# Altium PCB PCB1.PcbDoc
Units mil, origin at the board's own origin, x right, y up, seen from the top; angles counter-clockwise.
Board outline 1500 x 625 mil, 2 copper layers (Top Layer, Bottom Layer), stack 61.8 mil thick; 12 components, 7 nets, 58 pads, 21 vias.
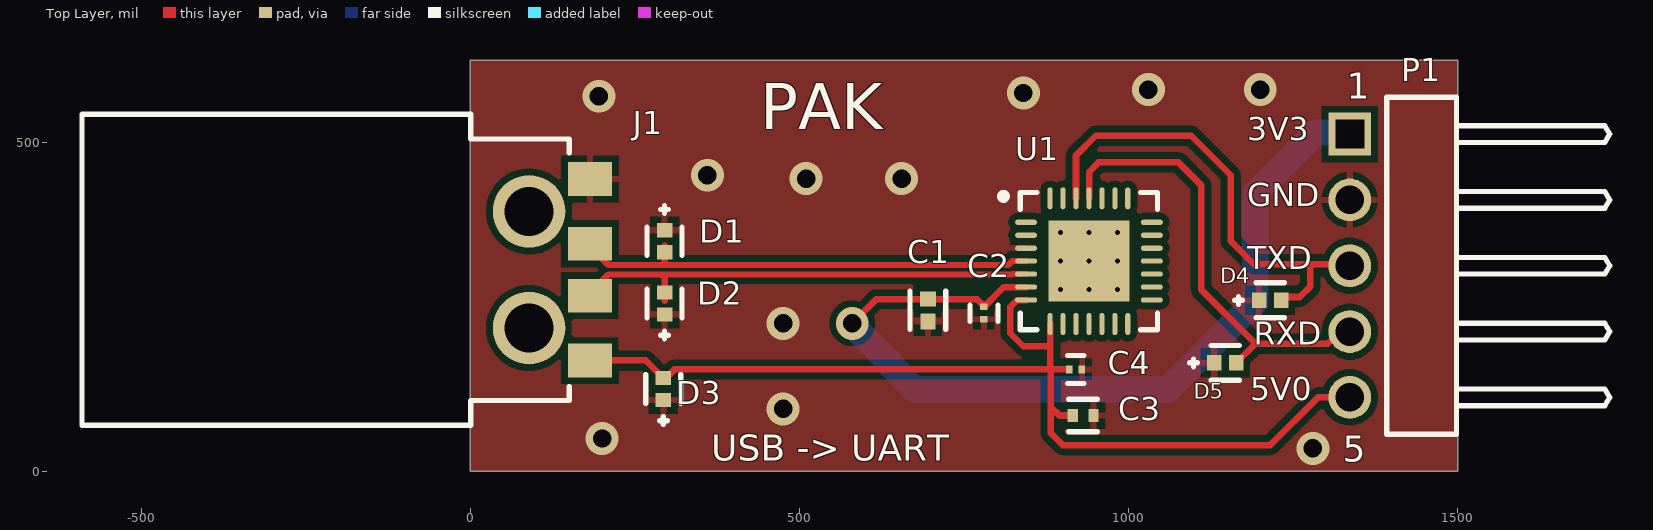
[diagram p0: Top Layer view]
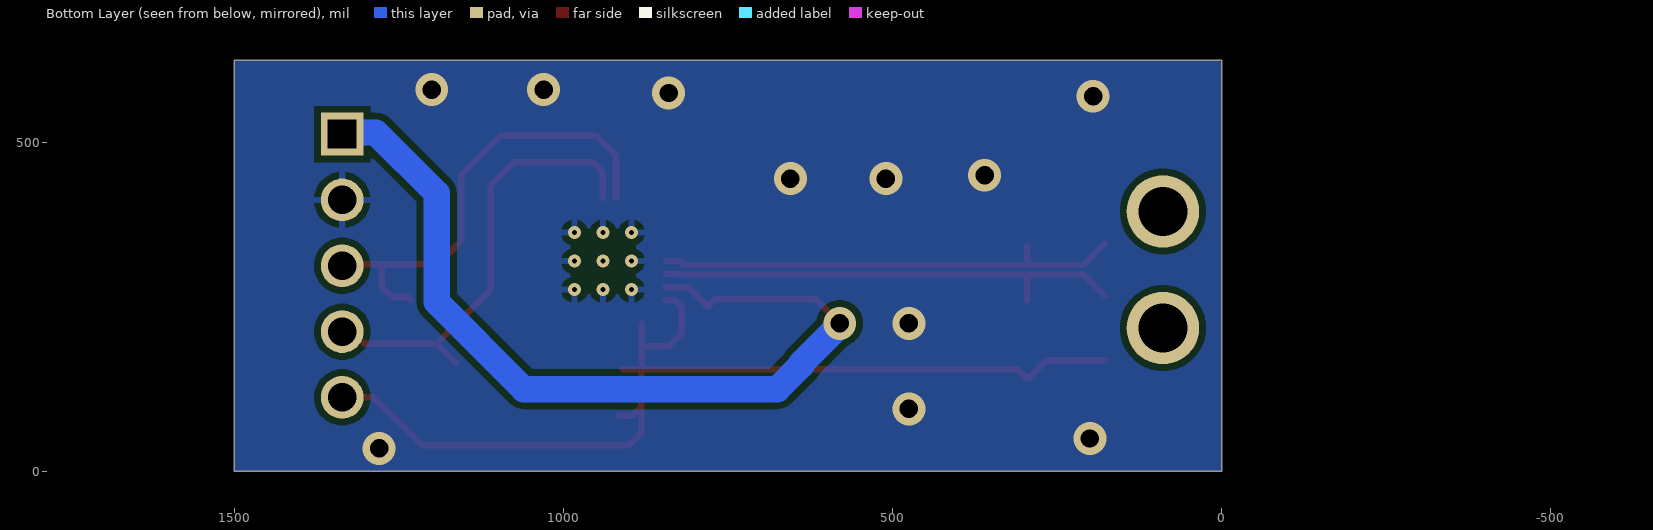
[diagram p1: Bottom Layer view, seen from below]
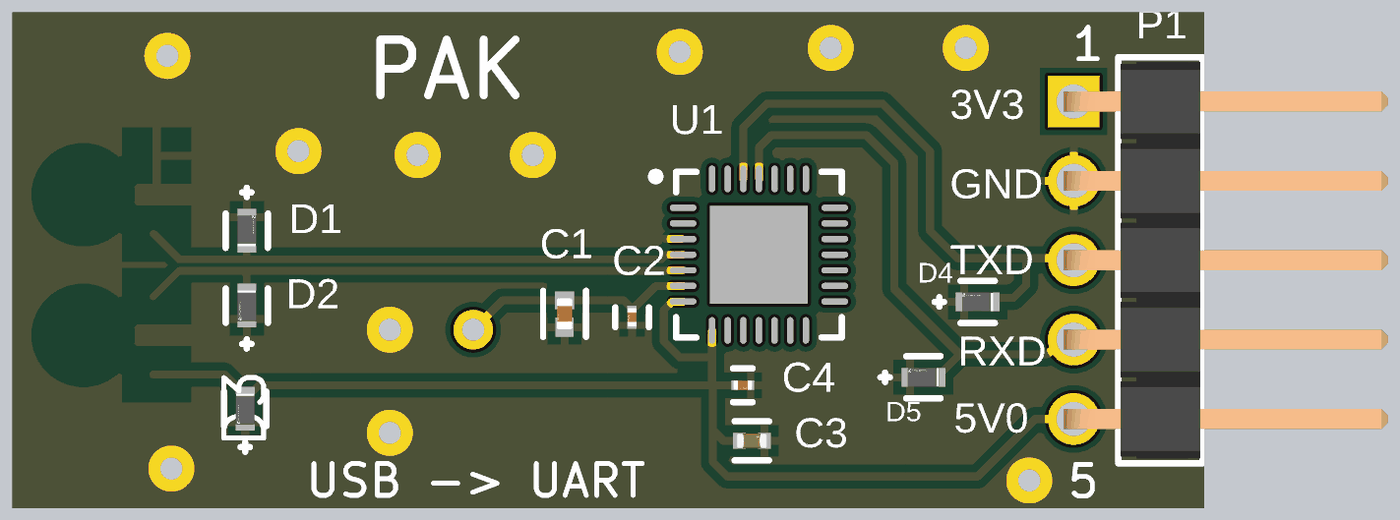
[diagram p2: 3D render of the assembled board from above, using the file's embedded part models]

## Layer stack, top to bottom
Top Solder: solder mask 0.4, Solder Resist, Dk 3.5
Top Layer: signal copper 1.4
Dielectric 1: dielectric 59, FR-4, Dk 4.8
Bottom Layer: signal copper 1.4
Bottom Solder: solder mask 0.4, Solder Resist, Dk 3.5

## Board outline
0,0 0,625 1500,625 1500,0

## Design rules (kind name [scope] priority, off if disabled: settings)
Clearance [All] p1: gap=10 ignorepadtopadclearanceinfootprint=FALSE except(0: Arc-Hole Track-Hole SMDPad-Hole THPad-Hole Via-Hole Fill-Hole Poly-Hole Region-Hole Text-Hole)
DiffPairsRouting [InDifferentialPair('DATA')] p1: maxlimit=5 minlimit=5 mostfreqgap=5 toplayer_minwidth=9.44 toplayer_maxwidth=9.44 toplayer_prefwidth=9.44 bottomlayer_minwidth=9.44 bottomlayer_maxwidth=9.44 bottomlayer_prefwidth=9.44 impedanceprofiledriven=TRUE impedanceprofileid={4EF35F85-3302-4D97-B5A8-BC5B2EF41BB8} impedanceprofilevalue=90.000000 maxuncoupledlength=500
PolygonConnect [All] p1: connectstyle=Relief reliefconductorwidth=10 reliefentries=4 polygonreliefangle="90 Angle" airgapwidth=10
RoutingVias [All] p1: holewidth=28 width=50 viastyle="Through Hole" minholewidth=28 minwidth=50 maxholewidth=28 maxwidth=50
SolderMaskExpansion [All] p1: expansion=4 istentingtop=FALSE
Width [All] p1: maxlimit=10 minlimit=10 preferedwidth=10
29 further rules are at their usual default settings.

## Classes and differential pairs
differential pair DATA: +NetD1_2 -NetD2_2

## Components (designator, comment, footprint, x,y, rotation, side; value= is the part's Value field where it differs from the comment)
C1 "4.7uF" FP-GRM155-0_1-IPC_B 695,245 r270 top
C2 "100nF" FP-GRM033-0_03-MFG 780,240.65 r270 top
C3 "1uF" FP-GRM15-0_1-MFG 930.75,85 r0 top
C4 "100nF" FP-GRM033-0_03-MFG 919.35,155 r0 top
D1 "UCLAMP3601P.TNT" FP-SLP1006P2-MFG 295,349.74 r270 top
D2 "UCLAMP3601P.TNT" FP-SLP1006P2-MFG 295,255.26 r90 top
D3 "UCLAMP3601P.TNT" FP-SLP1006P2-MFG 292.98,125.29 r90 top
D4 "UCLAMP3601P.TNT" FP-SLP1006P2-MFG 1215,260 r0 top
D5 "UCLAMP3601P.TNT" FP-SLP1006P2-MFG 1146.73,165 r0 top
J1 "629004113921" 629004113921 -220.06,306.42 r270 top
P1 "61300511021" 61300511021 1445,312.5 r90 top
U1 "CP2102-GM" SLAB-QFN-28-3125x3125TP_N 939.68,319.53 r0 top

## Footprints (in the part's own frame and the unit in brackets; to place one, negate y for a bottom-side part, rotate by r counter-clockwise, add the part's x,y. Pads: shape width x height; smd on the part's side, far side on the other; paste and mask are expansions set on the pad)
61300511021 [mm] "Pin Header, pitch 2.54 mm, THT, Angled, single row, 5p"
  rect 1.65x1.65 hole 1.1 square: 1(5.08,2.77)
  round 1.65 hole 1.1: 2(2.54,2.77) 3(0,2.77) 4(-2.54,2.77) 5(-5.08,2.77)
  silkscreen extent -6.5,-7.27 6.5,1.35, body extent -6.35,-7.27 6.35,3.09, height 2.58
629004113921 [mm] "USB 2.0 Plug Type A SMT with Clip"
  rect 1.3x1.7 smd: 1(3.5,10.2) 2(1,10.2) 3(-1,10.2) 4(-3.5,10.2)
  round 2.8 hole 1.9: Shell(-2.25,7.85) Shell(2.25,7.85)
  silkscreen extent -6,-9.4 6,9.4, body extent -6,-9.4 6,10.4, height 2.25
FP-GRM15-0_1-MFG [mm]
  rect 0.4x0.5 smd paste+0 mask+0: 1(-0.4,0) 2(0.4,0)
  silkscreen extent -0.55,-0.63 0.55,0.63, body extent -0.7,-0.38 0.7,0.38, height 0.25
FP-GRM033-0_03-MFG [mm]
  rect 0.25x0.3 smd paste+0 mask+0: 1(-0.238,0) 2(0.238,0)
  silkscreen extent -0.32,-0.54 0.32,0.54, body extent -0.46,-0.27 0.46,0.27, height 0.25
FP-GRM155-0_1-IPC_B [mil]
  rect 22.54x24.23 smd paste+0 mask+0: 1(-16.87,0)
  rect 24.23x22.54 smd paste+0 mask+0: 2(16.87,0)
  silkscreen extent -29,-27 29,27, body extent -35,-17 35,17, height 10
FP-SLP1006P2-MFG [mm]
  rect 0.55x0.6 smd paste+0 mask+0: 1(-0.425,0) 2(0.425,0)
  silkscreen extent -1.38,-0.67 0.55,0.67, body extent -0.8,-0.45 0.8,0.45, height 0.25
SLAB-QFN-28-3125x3125TP_N [mm] "QFN, 28-Leads, Body 5x5mm, Pitch 0.5mm, Thermal Pad 3.13x3.13mm, IPC Medium Density"
  oval 0.85x0.2 smd: 1(-2.425,1.5) 2(-2.425,1) 3(-2.425,0.5) 4(-2.425,0) 5(-2.425,-0.5) 6(-2.425,-1) 7(-2.425,-1.5) 15(2.425,-1.5) 16(2.425,-1) 17(2.425,-0.5) 18(2.425,0) 19(2.425,0.5) 20(2.425,1) 21(2.425,1.5)
  oval 0.2x0.85 smd: 8(-1.5,-2.425) 9(-1,-2.425) 10(-0.5,-2.425) 11(0,-2.425) 12(0.5,-2.425) 13(1,-2.425) 14(1.5,-2.425) 22(1.5,2.425) 23(1,2.425) 24(0.5,2.425) 25(0,2.425) 26(-0.5,2.425) 27(-1,2.425) 28(-1.5,2.425)
  rect 3.13x3.13 smd: 29(0,0)
  silkscreen extent -3.42,-2.65 2.65,2.65, body extent -2.5,-2.5 2.5,2.5, height 1

## Part data
C1: library part CMP-2008-04549-2, "Chip Multilayer Ceramic Capacitors for General Purpose, 0402, 4.7uF, X5R, 15%, 20%, 6.3V", Case Code (Imperial)=0402, Case Code (Metric)=1005, Dielectric=X5R, Max Operating Temperature=85°C, Min Operating Temperature=-55°C, Package Quantity=10000, Tolerance=20%, Voltage=6.3V, Capacitance=4.7uF, Case/Package=0402, Contact Plating=Tin, Depth=0.5mm, Height=0.5mm, Lead Free="Lead Free", Length=1mm, Mount="Surface Mount", Packaging="Tape and Reel", REACH SVHC="No SVHC", Termination=SMD/SMT, Thickness=0.022inch, Voltage Rating=6.3V, Voltage Rating (DC)=6.3V, Weight=0.000212oz, Width=0.02inch
C2 C4: library part CMP-06035-000062-2, "Chip Multilayer Ceramic Capacitors for General Purpose, 0201, 0.10uF, X5R, 15%, 10%, 6.3V", Case Code (Imperial)=0201, Case Code (Metric)=0603, Dielectric=X5R, Max Operating Temperature=85°C, Min Operating Temperature=-55°C, Package Quantity=1, Tolerance=10%, Voltage=6.3V, Capacitance=100nF, Case/Package=0201, Depth=0.3mm, Height=0.3mm, Lead Free="Lead Free", Length=0.6mm, Material=Ceramic, Mount="Surface Mount", Packaging="Tape and Reel", Radiation Hardening=No, REACH SVHC="No SVHC", Termination=SMD/SMT, Thickness=0.013inch, Voltage Rating=6.3V, Voltage Rating (DC)=6.3V, Weight=6E-06oz, Width=0.012inch
C3: library part CMP-2008-04556-2, "CAP CER 1UF 10V X5R 0402", Manufacturer=Murata, Manufacturer Part Number=GRM155R61A105KE15D, Package=GRM15-0.1, Temperature="-55°C to +85°C", Temperature Characteristic=X5R, Temperature Coefficient=15%, Temperature Range High=+85°C, Temperature Range Low=-55°C, Tolerance=10%, Voltage Rating=10V, Automotive=No, Capacitance=1uF, Category=Cap, ComponentLink2Description=Datasheet, ComponentLink2URL=https://search.murata.co.jp/Ceramy/image/img/A01X/G101/ENG/GRM155R61A105KE15-01A.pdf, Device Class L1="Passive Components", Device Class L2=Capacitors, Device Class L3="Ceramic Capacitors", Digikey Description="CAP CER 1UF 10V X5R 0402", Height=0.55mm, Ipc Land Pattern Name=CAPC10050X50, Lead Free=Yes, Material=Ceramic, Mouser Description="0402 1 uF 10 V ±10% Tolerance X5R Surface Mount Multilayer Ceramic Capacitor", Octopart=https://octopart.com/grm155r61a105ke15d-murata-197442, RoHS=TRUE
D1 D2 D3 D4 D5: library part CMP-56445-000005-1, "TVS DIODE 33VWM 60VC SLP1006P2", Case Code (Imperial)=0402, Case Code (Metric)=1006, Case/Package=SMD/SMT, Clamping Voltage=60V, Leakage Current=1uA, Max Breakdown Voltage=45V, Max Operating Temperature=125°C, Min Breakdown Voltage=36V, Min Operating Temperature=-40°C, Peak Pulse Current=2A, Peak Pulse Power=125W, Power Dissipation=170W, Power Line Protection=No, Resistor Type=Zener, Reverse Standoff Voltage=33V, Clamping Voltage-Max=60V, Depth=0.6mm, Diode Type=ZENER, Direction=Unidirectional, Element Configuration=Single, Lead Free="Lead Free", Length=1mm, Mount="Surface Mount", Number of Pins=2, Number of Unidirectional Channels=1, Packaging="Tape and Reel", Radiation Hardening=No, RoHS Compliant=Yes, Series="Automotive, AEC-Q100, uClamp®", Working Voltage=33V
J1: library part CMP-1502-03242-2, Contact Resistance=20mΩ, Current Rating=1.5A, Insulation Resistance=1GΩ, Max Operating Temperature=105°C, Min Operating Temperature=-40°C, Operating Supply Voltage=30V, Connector Type=USB, Contact Plating=Gold, Features=Shielded, Gender=Male, Lead Free="Lead Free", Length=18.8mm, Mount="Horizontal, Surface Mount", NexarPartId=19991169, Number of Contacts=4, Number of Pins=4, Orientation=Horizontal, REACH SVHC=Unknown, RoHS=Compliant, Termination=SMD/SMT, USB Standard="USB 2.0"
P1: library part CMP-1502-01067-2, Color=Black, Contact Resistance=20mΩ, Current Rating=3A, Operating Supply Voltage=250V, Connector Type="Male Pin", Contact Material=Copper, Contact Mating Length=5.9944mm, Contact Plating=Gold, Gender=Male, Lead Pitch=2.54mm, Mount="Through Hole", NexarPartId=32855525, Number of Contacts=5, Number of Pins=5, Number of Positions=5, Number of Rows=1, Packaging=Bulk, Pitch=2.54mm, REACH SVHC=Unknown, RoHS=Compliant, Termination=Solder
U1: library part CMP-0511-00012-1, "Single-Chip USB to UART Bridge, 1024 Bytes EEPROM, -40 to 85 degC, 28-pin QFN, Tube", Manufacturer="Silicon Labs", Code_IPC=J-STD-020C, Code_JEDEC=MO-220, ComponentLink1Description="Manufacturer URL", ComponentLink1URL=http://www.silabs.com/, ComponentLink2Description=Datasheet, ComponentLink2URL=http://www.silabs.com/Support%20Documents/TechnicalDocs/CP2102-9.pdf, ComponentLink3Description="Package Specification", ComponentLink3URL=http://www.silabs.com/Support%20Documents/TechnicalDocs/C8051T61x.pdf, DatasheetVersion="Rev. 1.5", EEPROM="1024 Bytes", Internal Oscillator=TRUE, Mounting Technology="Surface Mount", PackageDescription="28-Pin Quad-Flat No-Leads Package, Body 5 x 5 mm, Pitch 0.5 mm", PackageReference=QFN-28, PartNumber=CP2102-GM, Sub-Family="USB Bridges"

## Via types
v1: diameter 50, hole 28, Top Layer to Bottom Layer, 12 vias
v2: diameter 19.68, hole 7.87, Top Layer to Bottom Layer, 9 vias

## Nets (pads, with @x,y where several pads share a name; then routed paths per layer and width w, separated by ;. In a path a pad name is that pad's centre, name@x,y a point inside that pad or via, vN(x,y) a via of type N, cw(c..) or ccw(c..) an arc to the next point about the centre after c; other vN are vias at no path point)
GND: C1.2 C2.2 C3.2 C4.2 D1.1 D2.1 D3.1 D4.1 D5.1 J1.4 P1.2 U1.3 U1.29
  other v1: 1280,35 200,50 475,95 475,225 510,445 655,445 360,450 195,570 840,575 1030,580 1200,580
  other v2: 896.38,276.22 939.68,276.22 982.99,276.22 896.38,319.53 939.68,319.53 982.99,319.53 896.38,362.83 939.68,362.83 982.99,362.83
NetD1_2: D1.2 J1.3 U1.4 | length 713.7
  Top Layer w9.44: J1.3@177.52,345.79 209.67,313.64 291.17,313.64 ; D1.2@295,343.27 D1.2 295,317.46 291.17,313.64 ; U1.4 822.76,319.53 816.87,313.64 291.17,313.64
NetD2_2: D2.2 J1.2 U1.5 | length 722.3
  Top Layer w9.44: J1.2@177.52,267.05 209.67,299.2 290,299.2 ; 295,259.23 D2.2 295,294.2 290,299.2 ; U1.5 823.49,299.84 822.85,299.2 290,299.2
NetD4_2: D4.2 P1.3 U1.26 | length 720.8
  Top Layer w10: U1.26 920,480 950,510 1095,510 1155,450 1155,350 1190,315 1276.15,315 ; D4.2 1236.73,265 1260,265 1276.15,281.15 1276.15,315 ; P1.3 1333.44,315 1276.15,315
NetD5_2: D5.2 P1.4 U1.25 | length 698
  Top Layer w10: U1.25@940,415 940,455 955,470 1075,470 1110,435 1110,276.54 1192.5,194.04 ; D5.2 1192.5,194.04 ; P1.4 1321.07,212.5 1302.61,194.04 1192.5,194.04
VBUS: C3.1 C4.1 D3.2 J1.1 P1.5 U1.7 U1.8 | length 1583
  Top Layer w10: J1.1@177.52,168.62 266.38,168.62 D3.2 297.02,142.02 310,155 881.75,155 ; U1.7@844.21,260.16 830.16,260.16 820,250 820,210 839.91,190.09 880.63,190.09 ; U1.8 880.63,190.09 ; C4.1 881.75,155 ; C3.1 895,85 881.75,98.25 ; P1.5 1287.5,112.5 1215,40 900,40 881.75,58.25 881.75,98.25 ; 880.63,190.09 880.63,156.12 881.75,155 ; 881.75,98.25 881.75,155
VDD: C1.1 C2.1 P1.1 U1.6 | length 1360.7
  Top Layer w10: v1(580,225) 616.87,261.87 769.35,261.87 780,251.22 C2.1 810.16,280.16 U1.6
  Bottom Layer w10: P1.1@1333.44,515 P1.1
  Bottom Layer w25: P1.1@1333.44,510 P1.1
  Bottom Layer w40: v1(580,225) 580,222.29 638.48,163.81 638.48,161.52 675,125 1060,125 1192.5,257.5 1192.5,422.5 1285,515 P1.1@1333.44,515
pads on no net: J1.Shell U1.1 U1.2 U1.9 U1.10 U1.11 U1.12 U1.13 U1.14 U1.15 U1.16 U1.17 U1.18 U1.19 U1.20 U1.21 U1.22 U1.23 U1.24 U1.27 U1.28

## Polygon pours and split planes (outlines as drawn)
GND on Top Layer "GND Pour" (solid, pour order 0): 0,625 1500,625 1500,0 0,0
GND on Bottom Layer "GND Pour" (solid, pour order 1): 0,625 1500,625 1500,0 0,0

## Silkscreen, mask and mechanical layers (free items; w line width, h text height)
Top Overlay:
  text "1" at 1331,566 h40
  text "PAK" at 440,520 h70
  text "3V3" at 1180,490.69 h60
  text "GND" at 1180,390.64 h60
  text "TXD" at 1180,295 h60
  text "RXD" at 1190,180 h60
  text "5V0" at 1185,95.64 h60
  text "USB -> UART" at 366,16 h40

## Text inside footprints (layer, text, board x,y; h text height)
J1: Mechanical 2 "PCB Edge" at -40.92,385.16 h24 r270
P1: Top Overlay "5" at 1325,15 h40